# EAGLE board Adaptador RF2400nano (EAGLE 6.3)
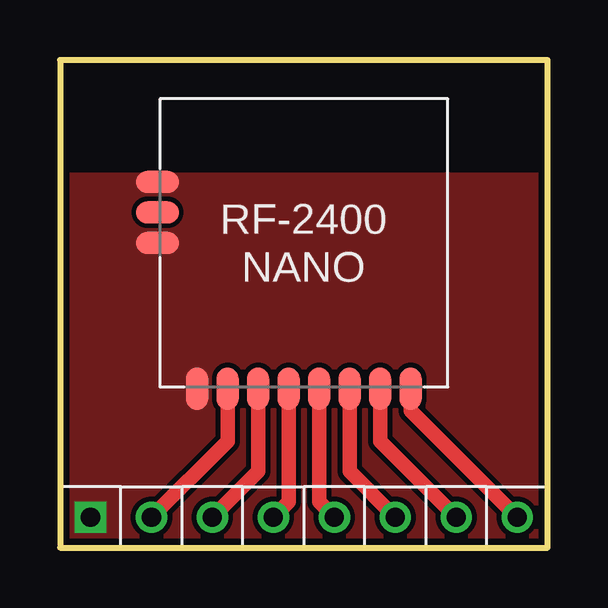
[diagram p0: board, top side]

Size 20.32 x 20.32 mm. Coordinates in mm from the lower left corner, seen from the top.
Outline: 0,0 20.32,0 20.32,20.32 0,20.32 0,0
Copper layers (1*16): Top 0.035mm / dielectric 1.5mm / Bottom 0.035mm
Design rules "default *": minimum track width 10mil, minimum drill 24mil, track to track 8mil, track to pad 8mil, pad to pad 8mil, via to via 8mil, smd to smd 8mil, copper to edge 10mil, drill to drill 8mil, minimum pad ring 10mil, minimum via ring 8mil, stop-mask expansion 4mil, vias tented up to drill 0mil, thermal gap 10mil
tRestrict: area 0,15.7 to 20.3,20.3

## Footprints (pad centres in the part's own frame; a part is rotated, then mirrored left to right if it is on the bottom)
RF-2400-NANO = smd 0.914 x 1.778: 1 -4.445,-6.08; 2 -3.175,-6.08; 3 -1.905,-6.08; 4 -0.635,-6.08; 5 0.635,-6.08; 6 1.905,-6.08; 7 3.175,-6.08; 8 4.445,-6.08 | smd 1.778 x 0.914: 9 -6.096,0; 10 -6.096,1.27; 11 -6.096,2.54
8_PINES_HEMBRA = drill 0.8 square: P$1 1.27,1.27 | drill 0.8: P$2 3.81,1.27; P$3 6.35,1.27; P$4 8.89,1.27; P$5 11.43,1.27; P$6 13.97,1.27; P$7 16.51,1.27; P$8 19.05,1.27

## Placement (x,y rotation side)
E$1  [RF-2400-NANO]  10.16,12.7 0 top
E$2  [8_PINES_HEMBRA]  0,0 0 top

## Library data of the parts
E$1 E$2 = Robots

## Nets
GND: E$1.1 E$1.9 E$1.11 E$2.P$1
S$2: E$1.2 E$2.P$2
S$3: E$1.3 E$2.P$3
S$4: E$1.4 E$2.P$4
S$5: E$1.5 E$2.P$5
S$6: E$1.6 E$2.P$6
S$7: E$1.7 E$2.P$7
S$8: E$1.8 E$2.P$8

## Tracks (layer width: path | path; a pad name or v marks a point on that pad's centre or on a via)
GND
  pour Top (no thermals): 0,0 20.32,0 20.32,20.32 0,20.32
S$2
  Top 0.61: E$1.2 6.99,4.44 E$2.P$2
S$3
  Top 0.61: E$1.3 8.26,3.17 E$2.P$3
S$4
  Top 0.61: E$1.4 9.53,1.9 E$2.P$4
S$5
  Top 0.61: E$1.5 10.79,1.9 E$2.P$5
S$6
  Top 0.61: E$1.6 12.06,3.17 E$2.P$6
S$7
  Top 0.61: E$1.7 13.34,4.44 E$2.P$7
S$8
  Top 0.61: E$1.8 14.61,5.71 E$2.P$8